# Altium PCB PCB_feedpcb.pcbdoc
Units mil, origin at the board's own origin, x right, y up, seen from the top; angles counter-clockwise.
Board outline 2945 x 3215 mil, 2 copper layers (Top Layer, Bottom Layer); 9 components, 16 nets, 61 pads, 0 vias.
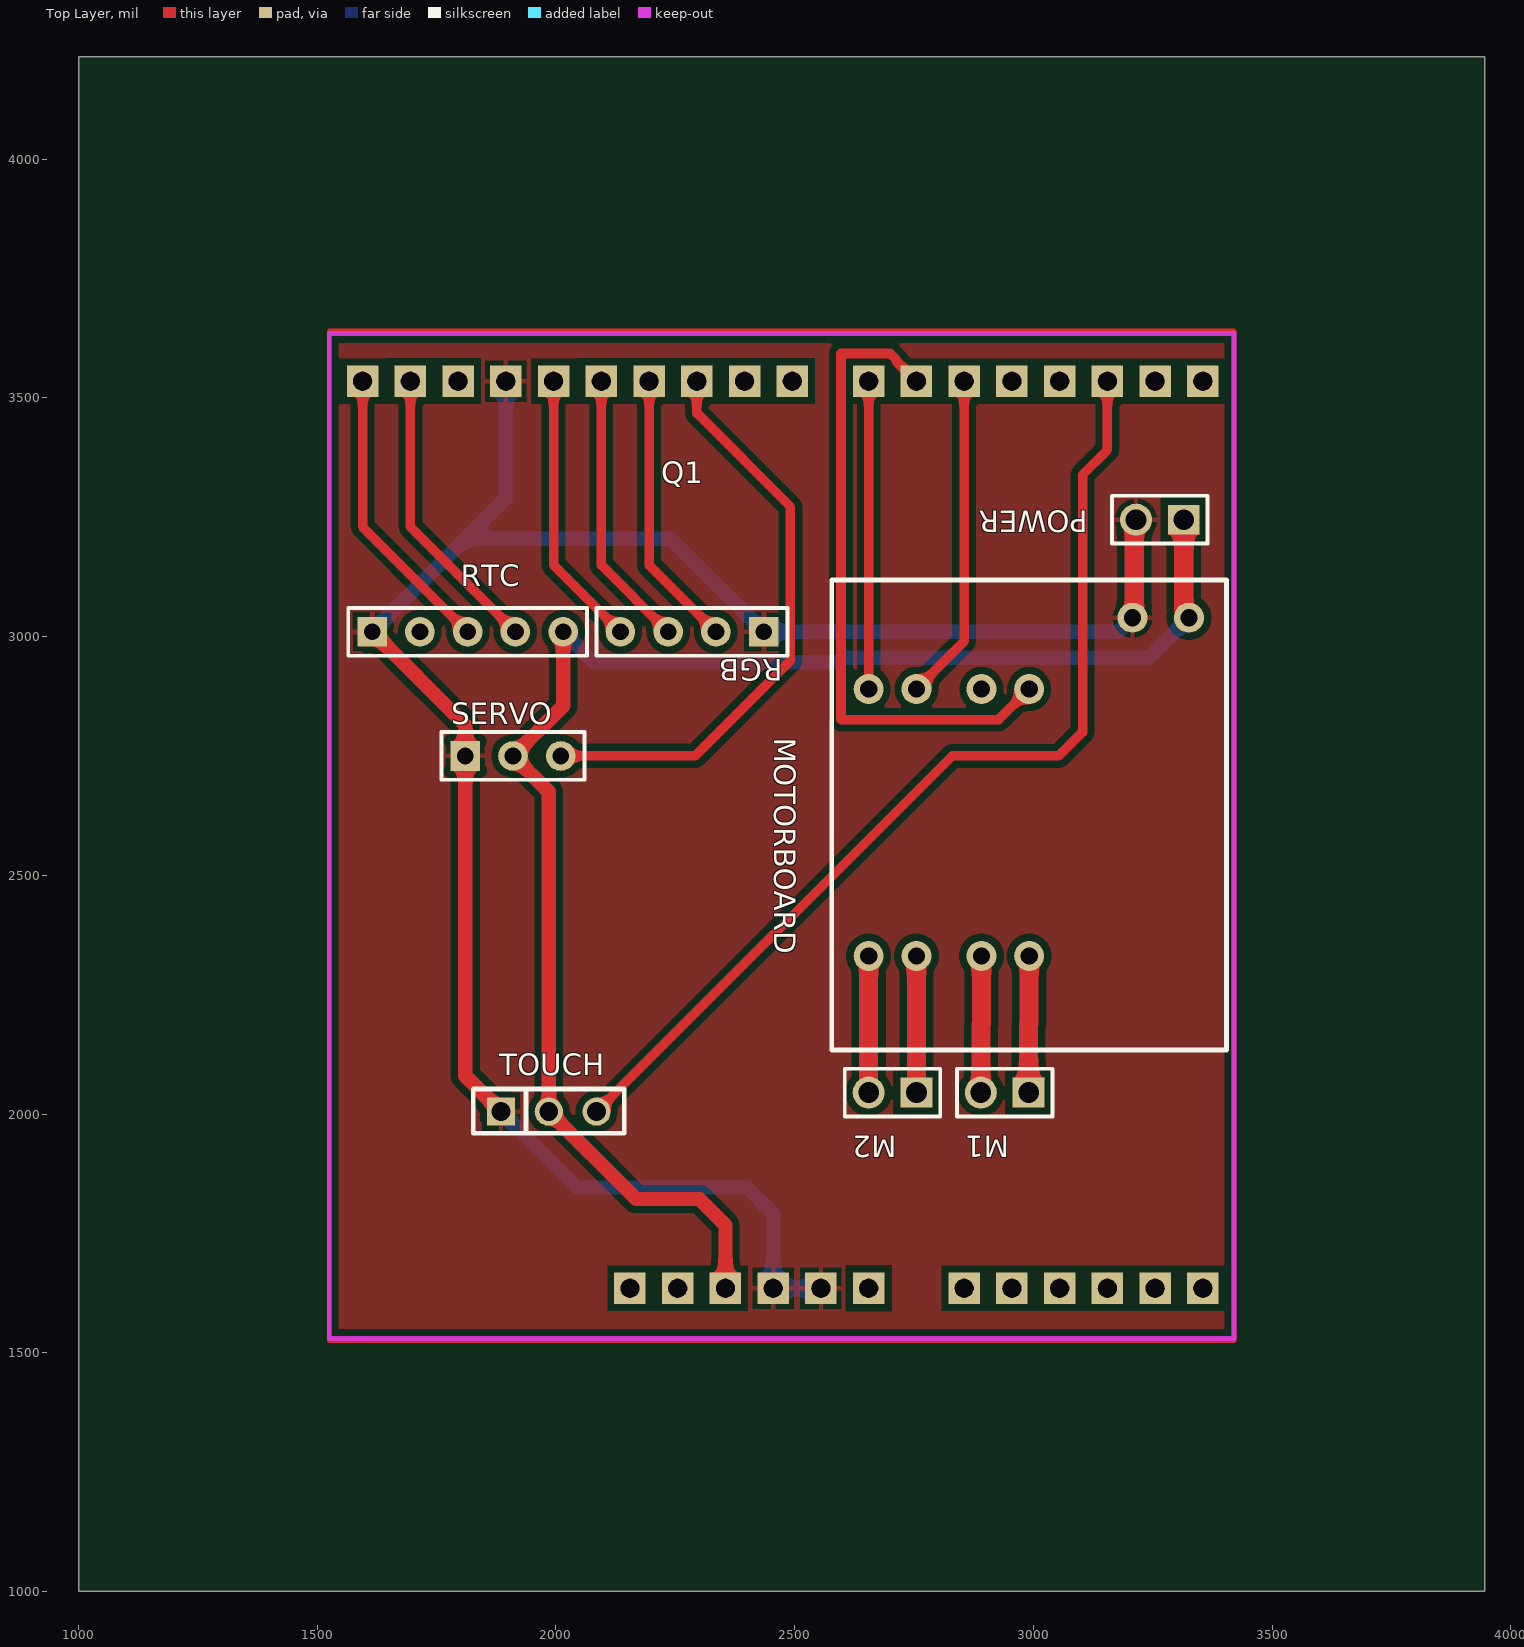
[diagram p0: Top Layer view]
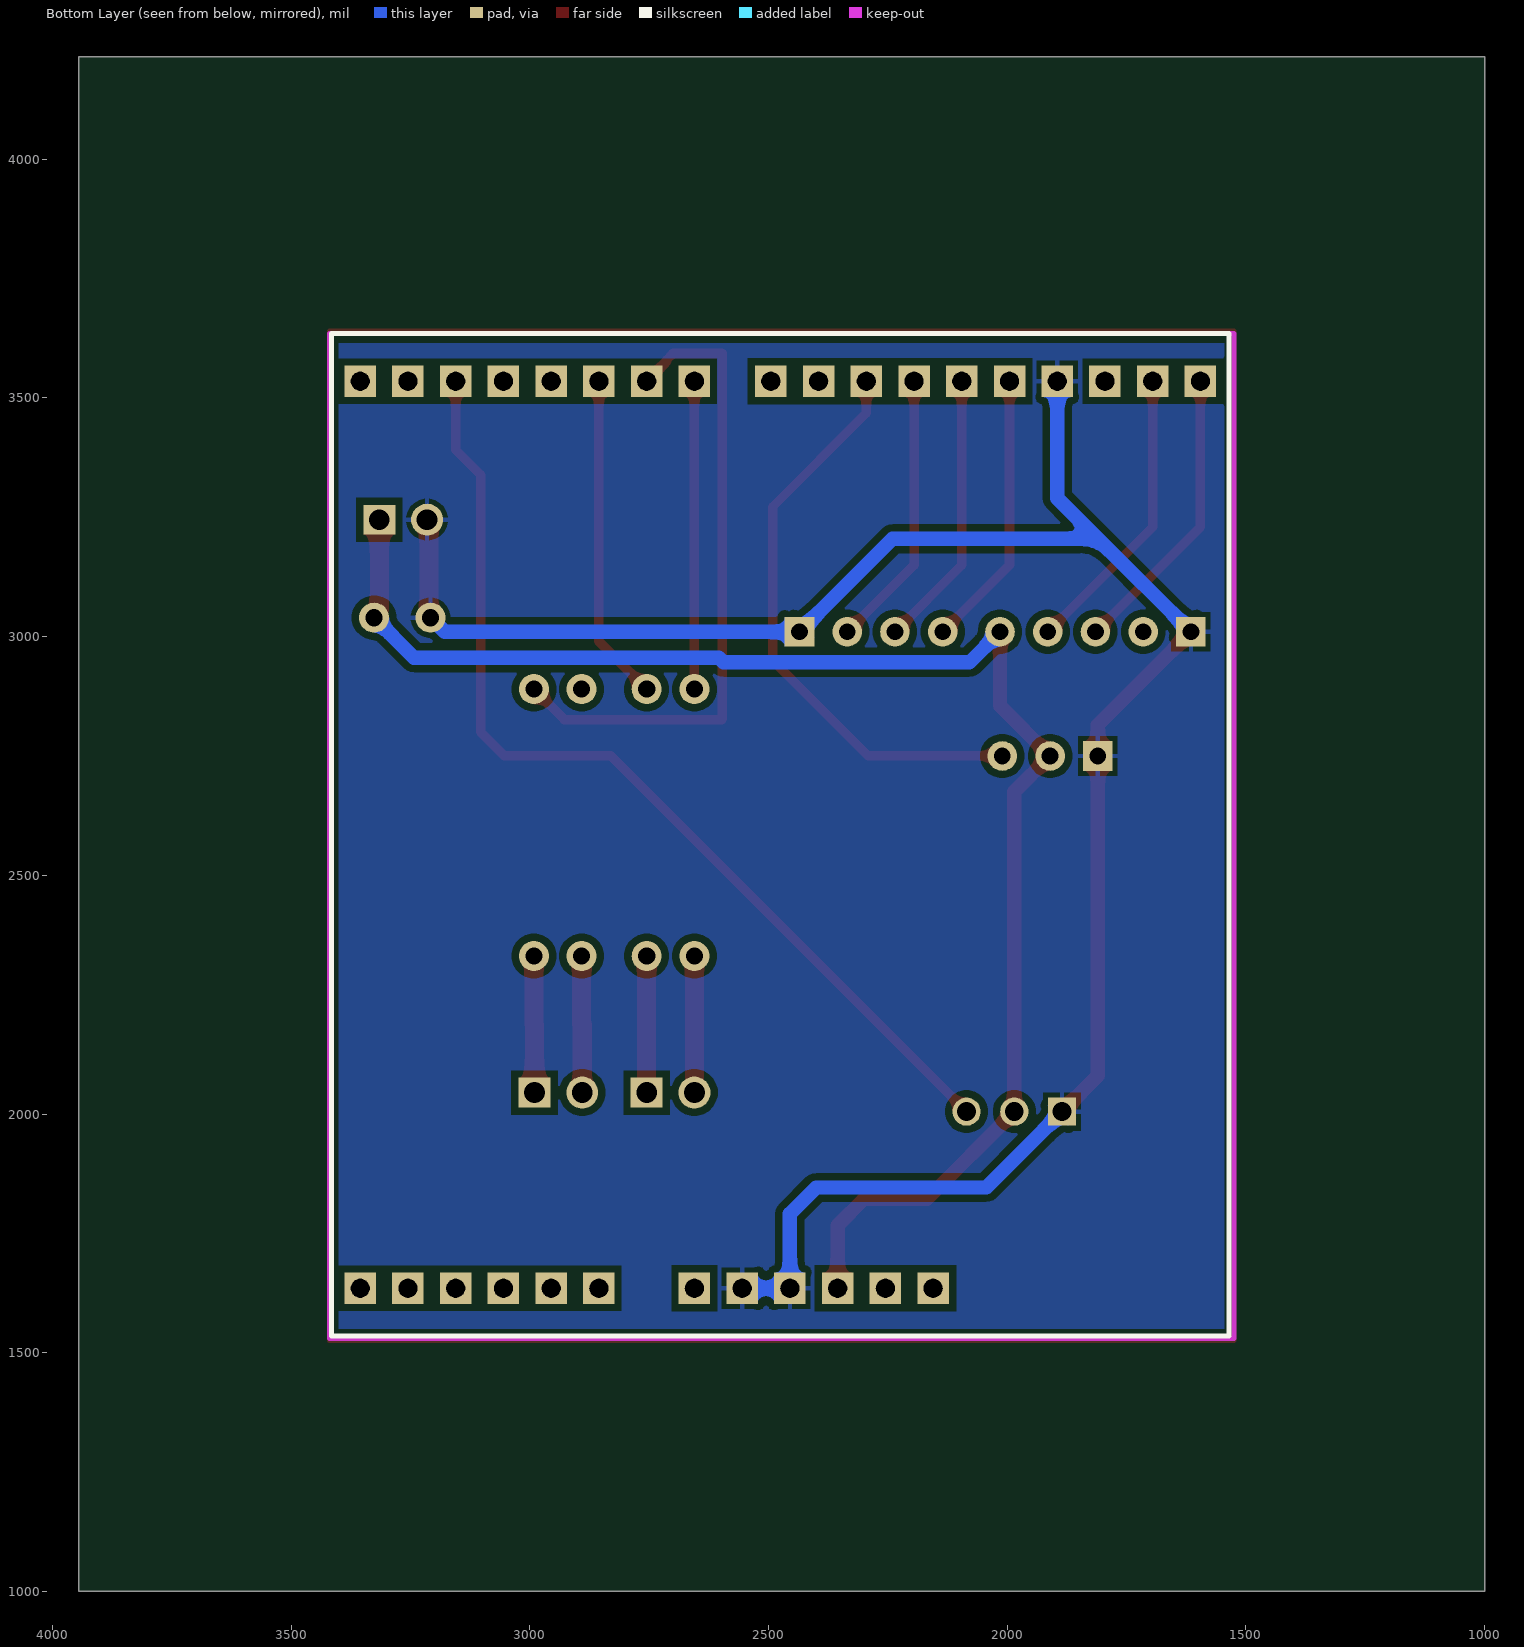
[diagram p1: Bottom Layer view, seen from below]

## Layer stack, top to bottom
Top Solder: solder mask 0.4, Solder Resist, Dk 3.5
Top Layer: signal copper 1.4
Dielectric1: dielectric 12.6, FR-4, Dk 4.8
Bottom Layer: signal copper 1.4
Bottom Solder: solder mask 0.4, Solder Resist, Dk 3.5

## Board outline
3945,1000 1000,1000 1000,4215 3945,4215

## Design rules (kind name [scope] priority, off if disabled: settings)
Clearance [All] p1: gap=15 ignorepadtopadclearanceinfootprint=TRUE
ComponentClearance [All] p1 off: gap=10 collisioncheckmode=3 verticalgap=10 showdistances=FALSE
PolygonConnect [All] p1: connectstyle=Relief reliefconductorwidth=10 reliefentries=4 polygonreliefangle="90 Angle" airgapwidth=10
RoutingVias [All] p1: holewidth=28 width=50 viastyle="Through Hole" minholewidth=28 minwidth=50 maxholewidth=28 maxwidth=50
SilkToSilkClearance [All] p1: silktosilkclearance=4
SolderMaskExpansion [All] p1: expansion=4 istentingtop=FALSE
Width vcc [InNet('+5V')] p1: maxlimit=40 minlimit=30 preferedwidth=30
Width gnd [InNet('GND')] p2: maxlimit=40 minlimit=10 preferedwidth=30
Width motor3 [InNet('NetM2_1')] p3: maxlimit=40 minlimit=10 preferedwidth=40
Width motor4 [InNet('NetM2_2')] p4: maxlimit=40 minlimit=10 preferedwidth=40
Width motor2 [InNet('NetM1_2')] p5: maxlimit=40 minlimit=10 preferedwidth=40
Width motor1 [InNet('NetM1_1')] p6: maxlimit=40 minlimit=10 preferedwidth=40
Width all [All] p7: maxlimit=40 minlimit=10 preferedwidth=20
28 further rules are at their usual default settings.

## Components (designator, comment, footprint, x,y, rotation, side; value= is the part's Value field where it differs from the comment)
M1 "HDR-M-2.54_1x2" HDR-M-2.54_1X2 2940,2045 r180 top
M2 "HDR-M-2.54_1x2" HDR-M-2.54_1X2 2705,2045 r180 top
MOTORBOARD "电机" ? 3404.61,3118.35 r270 top
POWER "HDR-M-2.54_1x2" HDR-M-2.54_1X2 3265,3245 r180 top
Q1 "ARDUINOR3-NOIOREF-NOTEXT" ARDUINOR3-NOTEXT-NOIOREF 2475,2585 r0 top
RGB "HDR-M-2.54_1x4" HDR-M-2.54_1X4 2285,3010 r180 top
RTC "HDR-M-2.54_1x5" HDR-M-2.54_1X5 1815,3010 r0 top
SERVO "servo" HDR-M-2.54_1X3 1910,2750 r0 top
TOUCH "touch 2.54MM 1X3PIN" HDR-TH_3P-P2.54_CS-1165SDIG 1985,2005 r0 top

## Footprints (in the part's own frame and the unit in brackets; to place one, negate y for a bottom-side part, rotate by r counter-clockwise, add the part's x,y. Pads: shape width x height; smd on the part's side, far side on the other; paste and mask are expansions set on the pad)
ARDUINOR3-NOTEXT-NOIOREF [mil]
  rect 66x66 hole 39.4 slot 39.6 at 0 deg paste-99999 mask+2: 3V(-220,-950) 5V(-120,-950) A0(380,-950) A1(480,-950) A2(580,-950) A3(680,-950) A4(780,-950) A5(880,-950) AREF(-680,950) D0(880,950) D1(780,950) D2(680,950) D3(580,950) D4(480,950) D5(380,950) D6(280,950) D7(180,950) D8(20,950) D9(-80,950) D10(-180,950) D11(-280,950) D12(-380,950) D13(-480,950) GND(-580,950) GND1(80,-950) GND2(-20,-950) RESET(-320,-950) SCL(-880,950) SDA(-780,950) VIN(180,-950)
HDR-M-2.54_1X2 [mm]
  rect 1.7x1.575 hole 1.1 paste-2539.97 mask+0.051: 1(-1.27,0)
  round 1.7 hole 1.1 paste-2539.97 mask+0.051: 2(1.27,0)
  silkscreen extent -2.54,-1.27 2.54,1.27
HDR-M-2.54_1X3 [mil]
  rect 62x62 hole 35 paste-99999 mask+2: 1(-100,0)
  round 62 hole 35 paste-99999 mask+2: 2(0,0) 3(100,0)
  silkscreen extent -150,-50 150,50
HDR-M-2.54_1X4 [mil]
  rect 62x62 hole 35 paste-99999 mask+2: 1(-150,0)
  round 62 hole 35 paste-99999 mask+2: 2(-50,0) 3(50,0) 4(150,0)
  silkscreen extent -200,-50 200,50
HDR-M-2.54_1X5 [mil]
  rect 62x62 hole 35 paste-99999 mask+2: 1(-200,0)
  round 62 hole 35 paste-99999 mask+2: 2(-100,0) 3(0,0) 4(100,0) 5(200,0)
  silkscreen extent -250,-50 250,50
HDR-TH_3P-P2.54_CS-1165SDIG [mm]
  rect 1.5x1.5 hole 1 paste-2539.97 mask+0.051: 1(-2.54,0)
  round 1.5 hole 1 paste-2539.97 mask+0.051: 2(0,0) 3(2.54,0)
  silkscreen extent -4.01,-1.15 4.02,1.2
? [mm]
  round 1.6 hole 0.914 paste-2539.97 mask+0.102: 1(2,-2) 2(2,-5) 3(5.8,-10.5) 4(5.8,-13.04) 5(5.8,-16.5) 6(5.8,-19.04) 7(20,-10.5) 8(20,-13.04) 9(20,-16.5) 10(20,-19.04)
  silkscreen extent 0,-21 25,0

## Part data
Q1: Package Display=No, Contributor=Adafruit, spicePre=Q, spiceSymbolName=ARDUINOR3-NOIOREF-NOTEXT
TOUCH: JLCPCB Part Class="Extended Part", Manufacturer=null, Manufacturer Part="排母2.54mm 1X3pin", Contributor=lcsc, spicePre=U, spiceSymbolName="排母2.54MM 1X3PIN", Supplier=LCSC, Supplier Part=C9900016709
M1 M2 POWER: Contributor=LCEDA_Lib, spicePre=J, spiceSymbolName=HDR-M-2.54_1x2, Supplier=LCSC, Supplier Part=C124375
MOTORBOARD: Contributor=lzy202040923021, spicePre=U, spiceSymbolName=电机
RGB: Contributor=aumster, spicePre=J, spiceSymbolName=HDR-M-2.54_1x4, Supplier=LCSC, Supplier Part=C124378
RTC: Contributor=wuyan05, spicePre=J, spiceSymbolName=HDR-M-2.54_1x5, Supplier=LCSC, Supplier Part=C358687
SERVO: Contributor=tdddddddd, spicePre=J, spiceSymbolName=HDR-M-2.54_1x3, Supplier=LCSC, Supplier Part=C180248

## Nets (pads, with @x,y where several pads share a name; then routed paths per layer and width w, separated by ;. In a path a pad name is that pad's centre, name@x,y a point inside that pad or via, vN(x,y) a via of type N, cw(c..) or ccw(c..) an arc to the next point about the centre after c; other vN are vias at no path point)
+5V: MOTORBOARD.1 POWER.1 Q1.5V RTC.5 SERVO.2 TOUCH.2 | length 3266.2
  Top Layer w30: RTC.5 2015,2855 SERVO.2 1985,2675 TOUCH.2 2168,1822 2300,1822 2355,1767 Q1.5V
  Top Layer w40: POWER.1 3315,3056.69 3325.87,3045.83 MOTORBOARD.1
  Bottom Layer w30: RTC.5 2079,2946 2594,2946 2604,2956 3242.26,2956 MOTORBOARD.1
GND: MOTORBOARD.2 POWER.2 Q1.GND Q1.GND1 Q1.GND2 RGB.1 RTC.1 SERVO.1 TOUCH.1 | length 4371.6
  Top Layer w30: RTC.1 1810,2815 SERVO.1 1810,2080 TOUCH.1
  Top Layer w40: MOTORBOARD.2 3211.38,3043.23 3211.38,3241.38 POWER.2
  Bottom Layer w30: RTC.1 1810,3205 ; TOUCH.1 2044,1846 2400,1846 2455,1791 Q1.GND2 Q1.GND1 ; Q1.GND 1895,3290 1810,3205 ; MOTORBOARD.2 3178.15,3010 RGB.1 2240,3205 1810,3205
L_B: Q1.D13 RGB.4 | length 583
  Top Layer w20: Q1.D13 1995,3150 RGB.4
L_G: Q1.D12 RGB.3 | length 583
  Top Layer w20: Q1.D12 2095,3150 RGB.3
L_R: Q1.D11 RGB.2 | length 583
  Top Layer w20: Q1.D11 2195,3150 RGB.2
M1_C1: MOTORBOARD.3 Q1.D6 | length 1370.9
  Top Layer w20: Q1.D6 2713,3577 2713,3580 2700,3593 2597,3593 2597,2827 2598,2826 2927.22,2826 MOTORBOARD.3
M2_C1: MOTORBOARD.5 Q1.D5 | length 686.4
  Top Layer w20: MOTORBOARD.5 2855,2990 Q1.D5
M2_C2: MOTORBOARD.6 Q1.D7 | length 645
  Top Layer w20: MOTORBOARD.6 Q1.D7
NetM1_1: M1.1 MOTORBOARD.7 | length 286.4
  Top Layer w40: M1.1 2990,2187 2991.22,2188.22 MOTORBOARD.7
NetM1_2: M1.2 MOTORBOARD.8 | length 286.4
  Top Layer w40: M1.2 2890,2187 2891.22,2188.22 MOTORBOARD.8
NetM2_1: M2.1 MOTORBOARD.9 | length 285.9
  Top Layer w40: M2.1 MOTORBOARD.9
NetM2_2: M2.2 MOTORBOARD.10 | length 285.9
  Top Layer w40: M2.2 MOTORBOARD.10
RTC_SCL: Q1.SCL RTC.3 | length 616.1
  Top Layer w20: Q1.SCL 1595,3230 RTC.3
RTC_SDA: Q1.SDA RTC.4 | length 616.1
  Top Layer w20: Q1.SDA 1695,3230 RTC.4
SERVO: Q1.D10 SERVO.3 | length 1230
  Top Layer w20: SERVO.3 2291,2750 2491,2950 2491,3272 2295,3468 Q1.D10
SIG: Q1.D2 TOUCH.3 | length 2103.8
  Top Layer w20: TOUCH.3 2830,2750 3053,2750 3103,2800 3103,3339 3155,3391 Q1.D2
pads on no net: MOTORBOARD.4 Q1.3V Q1.A0 Q1.A1 Q1.A2 Q1.A3 Q1.A4 Q1.A5 Q1.AREF Q1.D0 Q1.D1 Q1.D3 Q1.D4 Q1.D8 Q1.D9 Q1.RESET Q1.VIN RTC.2
copper on no net: | length 8020
  Top Layer w10: 1525,1525 3420,1525 3420,3640 1525,3640 1525,1525

## Polygon pours and split planes (outlines as drawn)
GND on Top Layer "GND_L01_P000" (solid, pour order 0): 1535,3635 3415,3635 3415,1535 1535,1535
GND on Bottom Layer "GND_L02_P001" (solid, pour order 1): 1535,3635 3415,3635 3415,1535 1535,1535

## Keep-outs
Keep-Out Layer:
  lines w10: 1525,1530 3420,1530 3420,3635 1525,3635 1525,1530

## Silkscreen, mask and mechanical layers (free items; w line width, h text height)
Document:
  lines w0.1: 2472.49,2607.49 2472.51,2607.51